# Altium PCB PCB1.PcbDoc
Units mil, origin at the board's own origin, x right, y up, seen from the top; angles counter-clockwise.
Board outline 5315 x 3715 mil, 2 copper layers (Top Layer, Bottom Layer); 10 components, 17 nets, 99 pads, 13 vias.
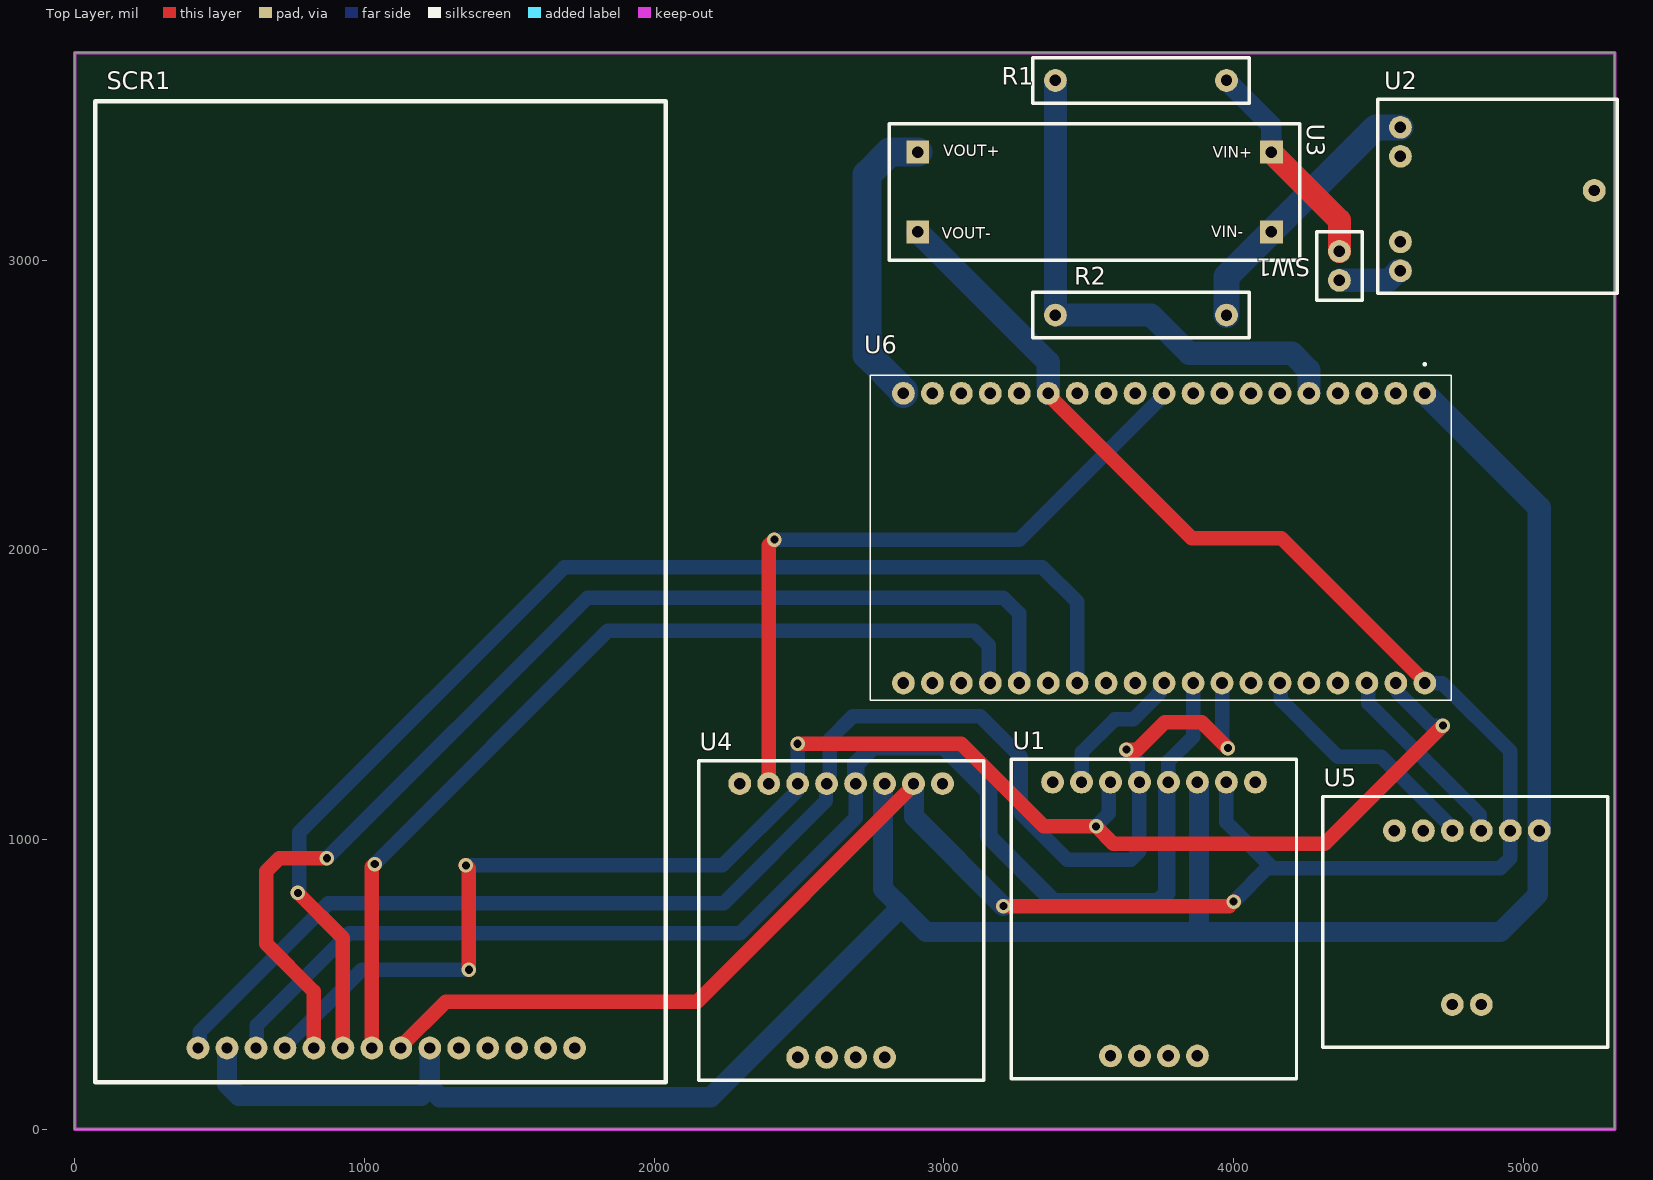
[diagram p0: Top Layer view]
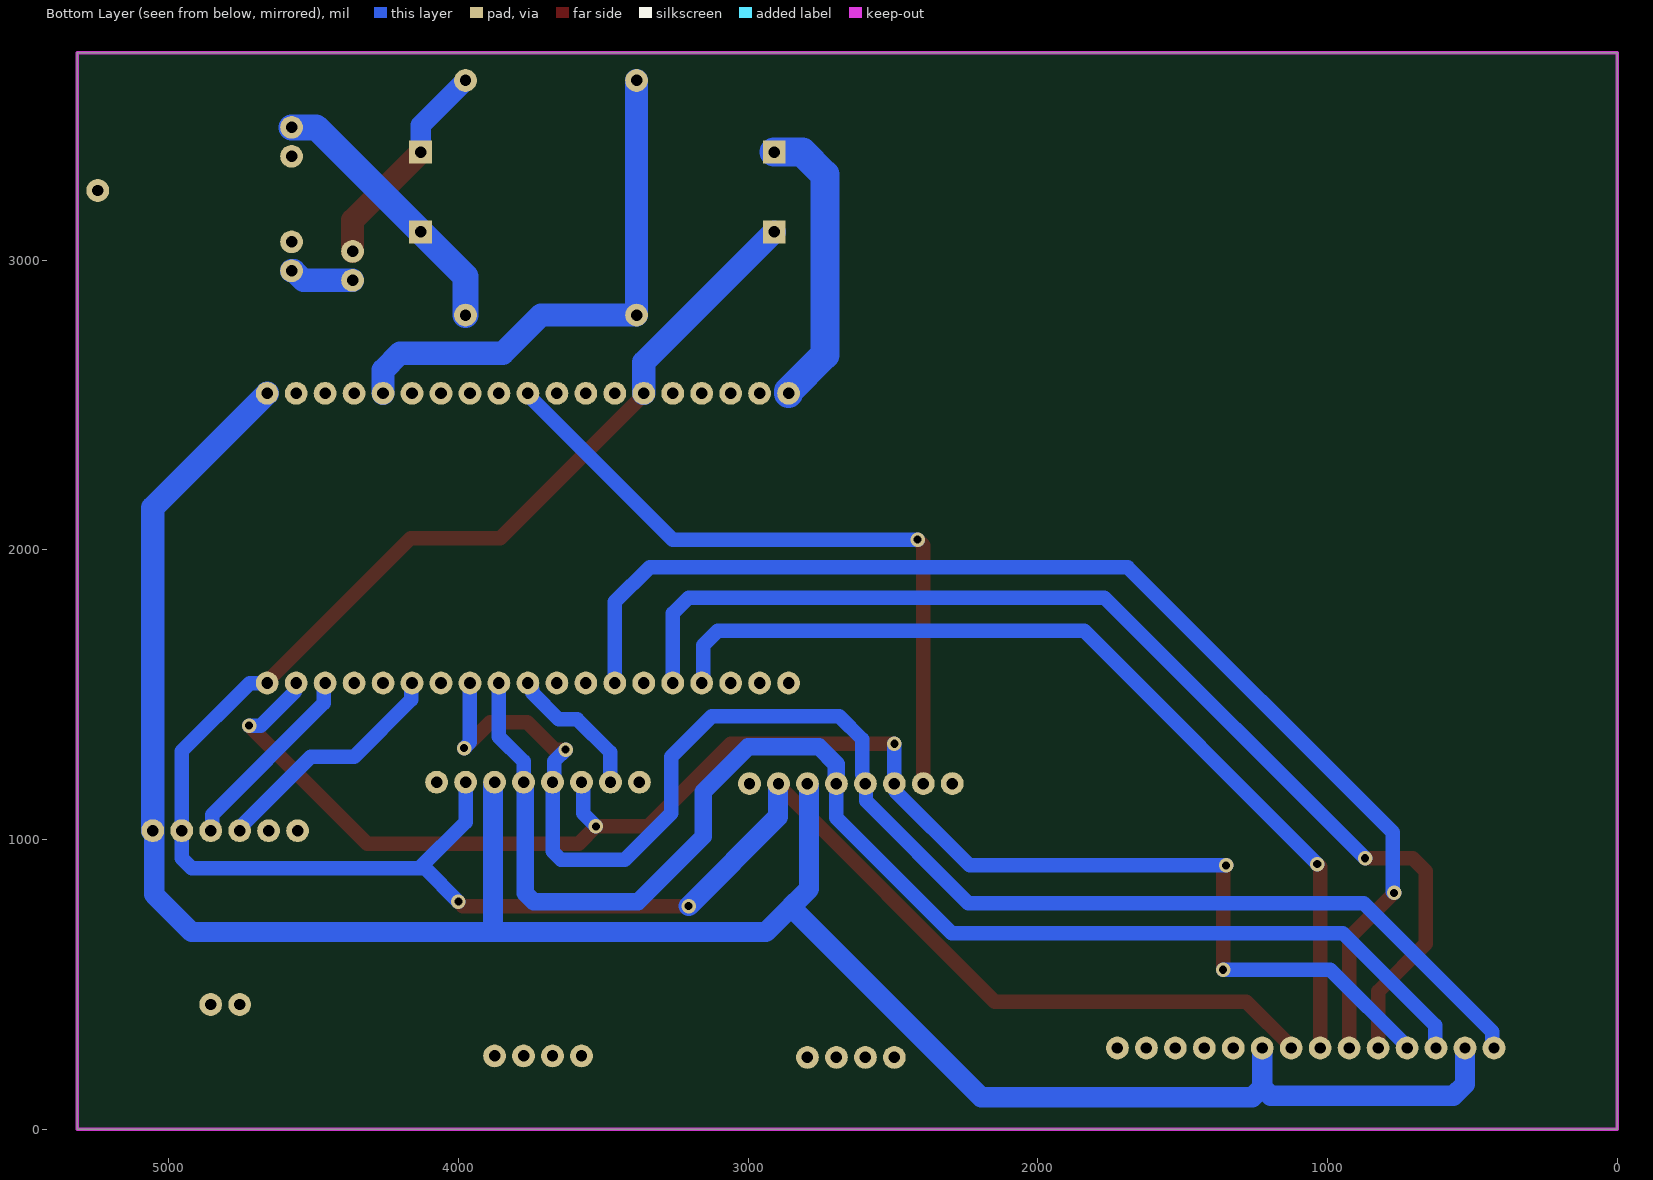
[diagram p1: Bottom Layer view, seen from below]

## Layer stack, top to bottom
Top Solder: solder mask 0.4, Solder Resist, Dk 3.5
Top Layer: signal copper 1.4
Dielectric 1: dielectric 12.6, FR-4, Dk 4.8
Bottom Layer: signal copper 1.4
Bottom Solder: solder mask 0.4, Solder Resist, Dk 3.5

## Board outline
0,0 0,3715 5315,3715 5315,0

## Design rules (kind name [scope] priority, off if disabled: settings)
Clearance [All] p1: gap=10 ignorepadtopadclearanceinfootprint=FALSE
PolygonConnect [All] p1: connectstyle=Relief reliefconductorwidth=10 reliefentries=4 polygonreliefangle="90 Angle" airgapwidth=10
RoutingVias [All] p1: holewidth=28 width=50 viastyle="Through Hole" minholewidth=28 minwidth=50 maxholewidth=28 maxwidth=50
SolderMaskExpansion [All] p1: expansion=4 istentingtop=FALSE
SupplyNets "Schematic Supply Nets" [InNet('GND')] p1: voltage=0.000
Width [All] p1: maxlimit=100 minlimit=10 preferedwidth=10 minimp=50.000000 maximp=50.000000 favimp=50.000000
30 further rules are at their usual default settings.

## Components (designator, comment, footprint, x,y, rotation, side; value= is the part's Value field where it differs from the comment)
R1 "RES_100K" RES 3680,3620 r0 top
R2 "RES_100K" RES 3680,2810 r180 top
SCR1 "SCREEN" LCD 1075,280 r0 top
SW1 "SWİTCH" SWİTCH 4365,2980 r90 top
U1 "MAX 31865" MAX31865 3725,725 r180 top
U2 "TP4056" TP4056 4910.35,3210.47 r270 top
U3 "MT3608" MT3608 3520,3235 r180 top
U4 "MAX 31865" MAX31865 2645,720 r180 top
U5 "INA219" INA219 4805,730 r180 top
U6 "ESP32" ESP32 3760,2040 r270 top

## Footprints (in the part's own frame and the unit in brackets; to place one, negate y for a bottom-side part, rotate by r counter-clockwise, add the part's x,y. Pads: shape width x height; smd on the part's side, far side on the other; paste and mask are expansions set on the pad)
ESP32 [mm]
  round 2 hole 1.02: 1(-12.7,22.86) 2(-12.7,20.32) 3(-12.7,17.78) 4(-12.7,15.24) 5(-12.7,12.7) 6(-12.7,10.16) 7(-12.7,7.62) 8(-12.7,5.08) 9(-12.7,2.54) 10(-12.7,0) 11(-12.7,-2.54) 12(-12.7,-5.08) 13(-12.7,-7.62) 14(-12.7,-10.16) 15(-12.7,-12.7) 16(-12.7,-15.24) 17(-12.7,-17.78) 18(-12.7,-20.32) 19(-12.7,-22.86) 20(12.7,-22.86) 21(12.7,-20.32) 22(12.7,-17.78) 23(12.7,-15.24) 24(12.7,-12.7) 25(12.7,-10.16) 26(12.7,-7.62) 27(12.7,-5.08) 28(12.7,-2.54) 29(12.7,0) 30(12.7,2.54) 31(12.7,5.08) 32(12.7,7.62) 33(12.7,10.16) 34(12.7,12.7) 35(12.7,15.24) 36(12.7,17.78) 37(12.7,20.32) 38(12.7,22.86)
  silkscreen extent -15.34,-25.76 14.23,25.2, body extent -14.1,-26.55 14.1,25.9, height 7.05
INA219 [mm]
  round 2 hole 1 mask+0.08: 1(-6.35,-7.62) 2(-3.81,-7.62) 3(-1.27,-7.62) 4(1.27,-7.62) 5(3.81,-7.62) 6(6.35,-7.62) ""(-1.27,7.62) ""(1.27,7.62)
  silkscreen extent -12.35,-10.62 12.65,11.38
LCD [mm]
  round 2 hole 1 mask+0.08: 0(-16.51,0) 1(-13.97,0) 2(-11.43,0) 3(-8.89,0) 4(-6.35,0) 5(-3.81,0) 6(-1.27,0) 7(1.27,0) 8(3.81,0) ""(6.35,0) ""(8.89,0) ""(11.43,0) ""(13.97,0) ""(16.51,0)
  silkscreen extent -25.51,-3 24.49,83
MAX31865 [mm]
  round 2 hole 1 mask+0.08: 1(-8.89,-12) 2(-6.35,-12) 3(-3.81,-12) 4(-1.27,-12) 5(1.27,-12) 6(3.81,-12) 7(6.35,-12) 8(8.89,-12) 9(-3.81,12) 10(-1.27,12) 11(1.27,12) 12(3.81,12)
  silkscreen extent -12.5,-14 12.5,14
MT3608 [mm]
  rect 2x2 hole 1 paste-2539.97 mask+0.102: 0(-15.5,3.5) 1(-15.5,-3.5) 2(15.5,-3.5) 3(15.5,3.5)
  silkscreen extent -18,-6 18,6
RES [mm]
  round 2 hole 1 mask+0.08: 1(-7.5,0) 2(7.5,0)
  silkscreen extent -9.5,-2 9.5,2
SWİTCH [mm]
  round 2 hole 1 mask+0.08: 0(-1.27,0) 1(1.27,0)
  silkscreen extent -3,-2 3,2
TP4056 [mm]
  round 2 hole 1 mask+0.08: 0(6.29,-8.5) 1(3.75,-8.5) 2(-3.75,-8.5) 3(-6.29,-8.5) 4(-0.75,8.5)
  silkscreen extent -8.75,-10.5 8.25,10.5

## Part data
U1 U4: library part MAX_31865
U5: library part INA_219

## Via types
v1: diameter 50, hole 28, Top Layer to Bottom Layer, 13 vias

## Nets (pads, with @x,y where several pads share a name; then routed paths per layer and width w, separated by ;. In a path a pad name is that pad's centre, name@x,y a point inside that pad or via, vN(x,y) a via of type N, cw(c..) or ccw(c..) an arc to the next point about the centre after c; other vN are vias at no path point)
GND: R2.1 U2.3 U3.0 | length 946.4
  Bottom Layer w90: R2.1 3975.28,2942.24 U3.0 4491.14,3458.11 U2.3
NetR1_1: R1.1 R2.2 U6.5 | length 1844
  Bottom Layer w80: R1.1 R2.2 3715,2810 3846.76,2678.24 4201.76,2678.24 4260,2620 U6.5
NetR1_2: R1.2 SW1.1 U3.1 | length 751.4
  Top Layer w80: U3.1 4365,3138.03 SW1.1
  Bottom Layer w70: R1.2 4130.24,3465.04 U3.1
NetSCR1_0: SCR1.0 U1.5 U4.5 U6.31 | length 5231.4
  Top Layer w50: v1(3630,1310) 3666.78,1310 3761.78,1405 3890,1405 v1(3980,1315)
  Bottom Layer w50: SCR1.0 430.5,285.5 430.5,335.5 875,780 2240,780 2592.85,1132.85 2592.85,1190.29 2600.5,1197.94 2600.5,1218.26 2605,1222.76 2605,1345 2685,1425 3125,1425 3265,1285 3265,1090 3425,930 3645.71,930 3675,959.29 U1.5 3669.5,1202.94 3669.5,1270.5 v1(3630,1310) ; U6.31 3960,1335 v1(3980,1315)
NetSCR1_1: SCR1.1 SCR1.8 U1.3 U4.3 U5.1 U6.1 | length 8067.1
  Bottom Layer w70: SCR1.1 525,155 565,115 1195.71,115 1225,144.29 ; SCR1.8 1225,144.29 ; U4.3 2789.5,1186.94 2789.5,829.5 2812,807 2852,767 2195,110 1259.29,110 1225,144.29 ; 2848.07,770.93 2939,680 3880.5,680 4920,680 5049.5,809.5 5049.5,1024.5 U5.1 ; U1.3 3880.5,1191.94 3880.5,684.5 3885,680
  Bottom Layer w80: U6.1 5055,2145 U5.1
NetSCR1_2: SCR1.2 U1.4 U4.4 U6.30 | length 4815.3
  Bottom Layer w50: SCR1.2 628.37,283.37 628.37,358.37 946.22,676.22 2296.22,676.22 2695,1075 U4.4 ; U1.4@3769.5,1191.94 U1.4 3775,1270 3860,1355 U6.30
  Bottom Layer w60: U4.4 2695,1260 2755,1320 3000,1320 3155,1165 3155,1010 3380,785 3740.21,785 3769.5,814.29 U1.4@3769.5,1191.94
NetSCR1_3: SCR1.3 U1.6 U4.6 U6.37 | length 5477.4
  Top Layer w50: v1(1350,910) 1360,900 v1(1360,550) ; v1(2495,1330) 3060,1330 3345,1045 v1(3525,1045) 3585,985 4315,985 v1(4722.57,1392.57)
  Bottom Layer w50: SCR1.3 725,285.18 989.82,550 v1(1360,550) ; v1(1350,910) 2235,910 2489.5,1164.5 2489.5,1186.94 U4.6 v1(2495,1330) ; v1(3525,1045) 3569.5,1089.5 3569.5,1191.94 U1.6 ; U6.37 4565.5,1534.5 4565.5,1509.5 4682.43,1392.57 v1(4722.57,1392.57)
NetSCR1_4: SCR1.4 U6.24 | length 3932.6
  Top Layer w50: SCR1.4 825,475 660,640 660,890 705,935 v1(870,935)
  Bottom Layer w50: v1(870,935) 1770,1835 3205,1835 3260,1780 U6.24
NetSCR1_5: SCR1.5 U6.26 | length 4205
  Top Layer w50: v1(770,815) 925,660 SCR1.5
  Bottom Layer w50: v1(770,815) 775,820 775,1025 1690,1940 3340,1940 3460,1820 U6.26
NetSCR1_6: SCR1.6 U6.23 | length 3245.4
  Top Layer w50: SCR1.6 1025,905 v1(1035,915)
  Bottom Layer w50: v1(1035,915) 1840,1720 3105,1720 3154.5,1670.5 3154.5,1545.5 U6.23
NetSCR1_7: SCR1.7 U1.2 U3.3 U4.2 U5.2 U6.14 U6.38 | length 8113.2
  Top Layer w50: SCR1.7 1125,285.18 1279.82,440 2147.73,440 2895,1187.27 U4.2 ; v1(3205,770) 3985,770 v1(4000,785) ; U6.14 3360,2534.82 3854.82,2040 4165.18,2040 4660,1545.18 U6.38
  Bottom Layer w50: U1.2 3975,1060 4135,900 ; v1(4000,785) 4115,900 4920,900 4955,935 U5.2 4955,1305 4720.87,1539.13 4660.87,1539.13 U6.38
  Bottom Layer w70: U4.2 2896.93,1190.51 2896.93,1078.07 v1(3205,770)
  Bottom Layer w80: U3.3 3360,2646.97 U6.14
NetSW1_0: SW1.0 U2.0 | length 224.3
  Bottom Layer w80: SW1.0 4535.1,2930 4567.93,2962.83 U2.0
NetU1_7: U1.7 U6.29 | length 498.7
  Bottom Layer w50: U1.7 3475,1300 3589.01,1414.01 3654.01,1414.01 3745.63,1505.63 3745.63,1517.85 3760,1532.22 U6.29
NetU3_2: U3.2 U6.19 | length 1013.8
  Bottom Layer w100: U6.19 2860,2547.78 2735,2672.78 2735,3295 2812.8,3372.8 U3.2
NetU4_7: U4.7 U6.10 | length 2408.1
  Top Layer w50: U4.7 2395,2015 v1(2415,2035)
  Bottom Layer w50: v1(2415,2035) 3260.18,2035 3760,2534.82 U6.10
NetU5_3: U5.3 U6.36 | length 673.6
  Bottom Layer w50: U6.36 4465.5,1534.5 4465.5,1469.5 4849.5,1085.5 4849.5,1035.5 U5.3
NetU5_4: U5.4 U6.33 | length 844.3
  Bottom Layer w50: U6.33 4163.37,1536.63 4163.37,1481.63 4360,1285 4510,1285 4740.63,1054.37 4740.63,1052.15 4755,1037.78 U5.4
pads on no net: SCR1. U1.1 U1.8 U1.9 U1.10 U1.11 U1.12 U2.1 U2.2 U2.4 U4.1 U4.8 U4.9 U4.10 U4.11 U4.12 U5. U5.5 U5.6 U6.2 U6.3 U6.4 U6.6 U6.7 U6.8 U6.9 U6.11 U6.12 U6.13 U6.15 U6.16 U6.17 U6.18 U6.20 U6.21 U6.22 U6.25 U6.27 U6.28 U6.32 U6.34 U6.35

## Keep-outs
Keep-Out Layer:
  the board outline again, w11.81

## Silkscreen, mask and mechanical layers (free items; w line width, h text height)
Top Overlay:
  text "VOUT+" at 2997.87,3357.87 h39.37
  text "VIN+" at 3927.87,3352.87 h39.37
  text "VIN-" at 3922.87,3077.87 h39.37
  text "VOUT-" at 2992.87,3072.87 h39.37
Drill Drawing:
  the board outline again, w11.81